# Altium PCB interposer-breakout.PcbDoc
Units mil, origin at the board's own origin, x right, y up, seen from the top; angles counter-clockwise.
Board outline 1400 x 1259 mil, 2 copper layers (Top, Bottom), stack 52.756 mil thick; 12 components, 30 nets, 90 pads, 64 vias.
Unrouted connection lines stored in the file: 4.
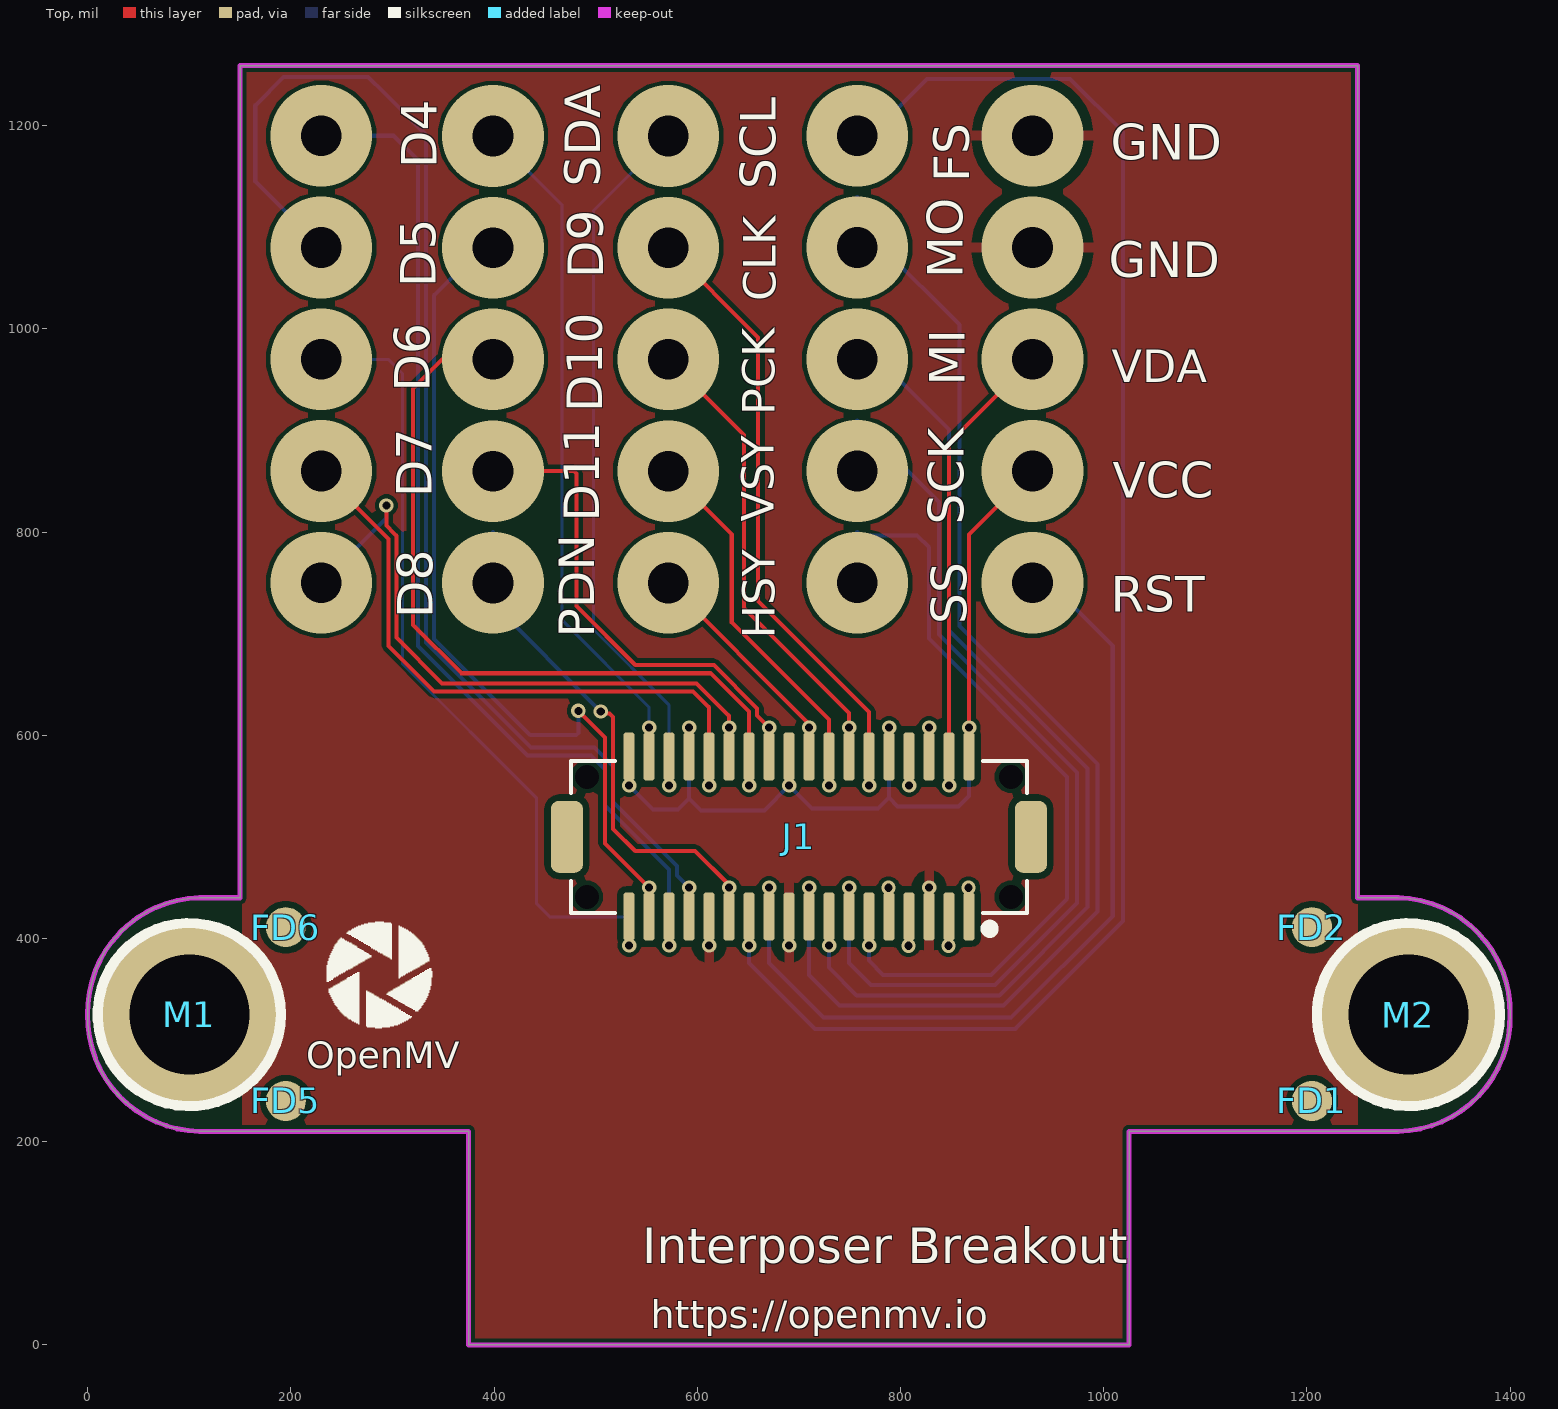
[diagram p0: Top view]
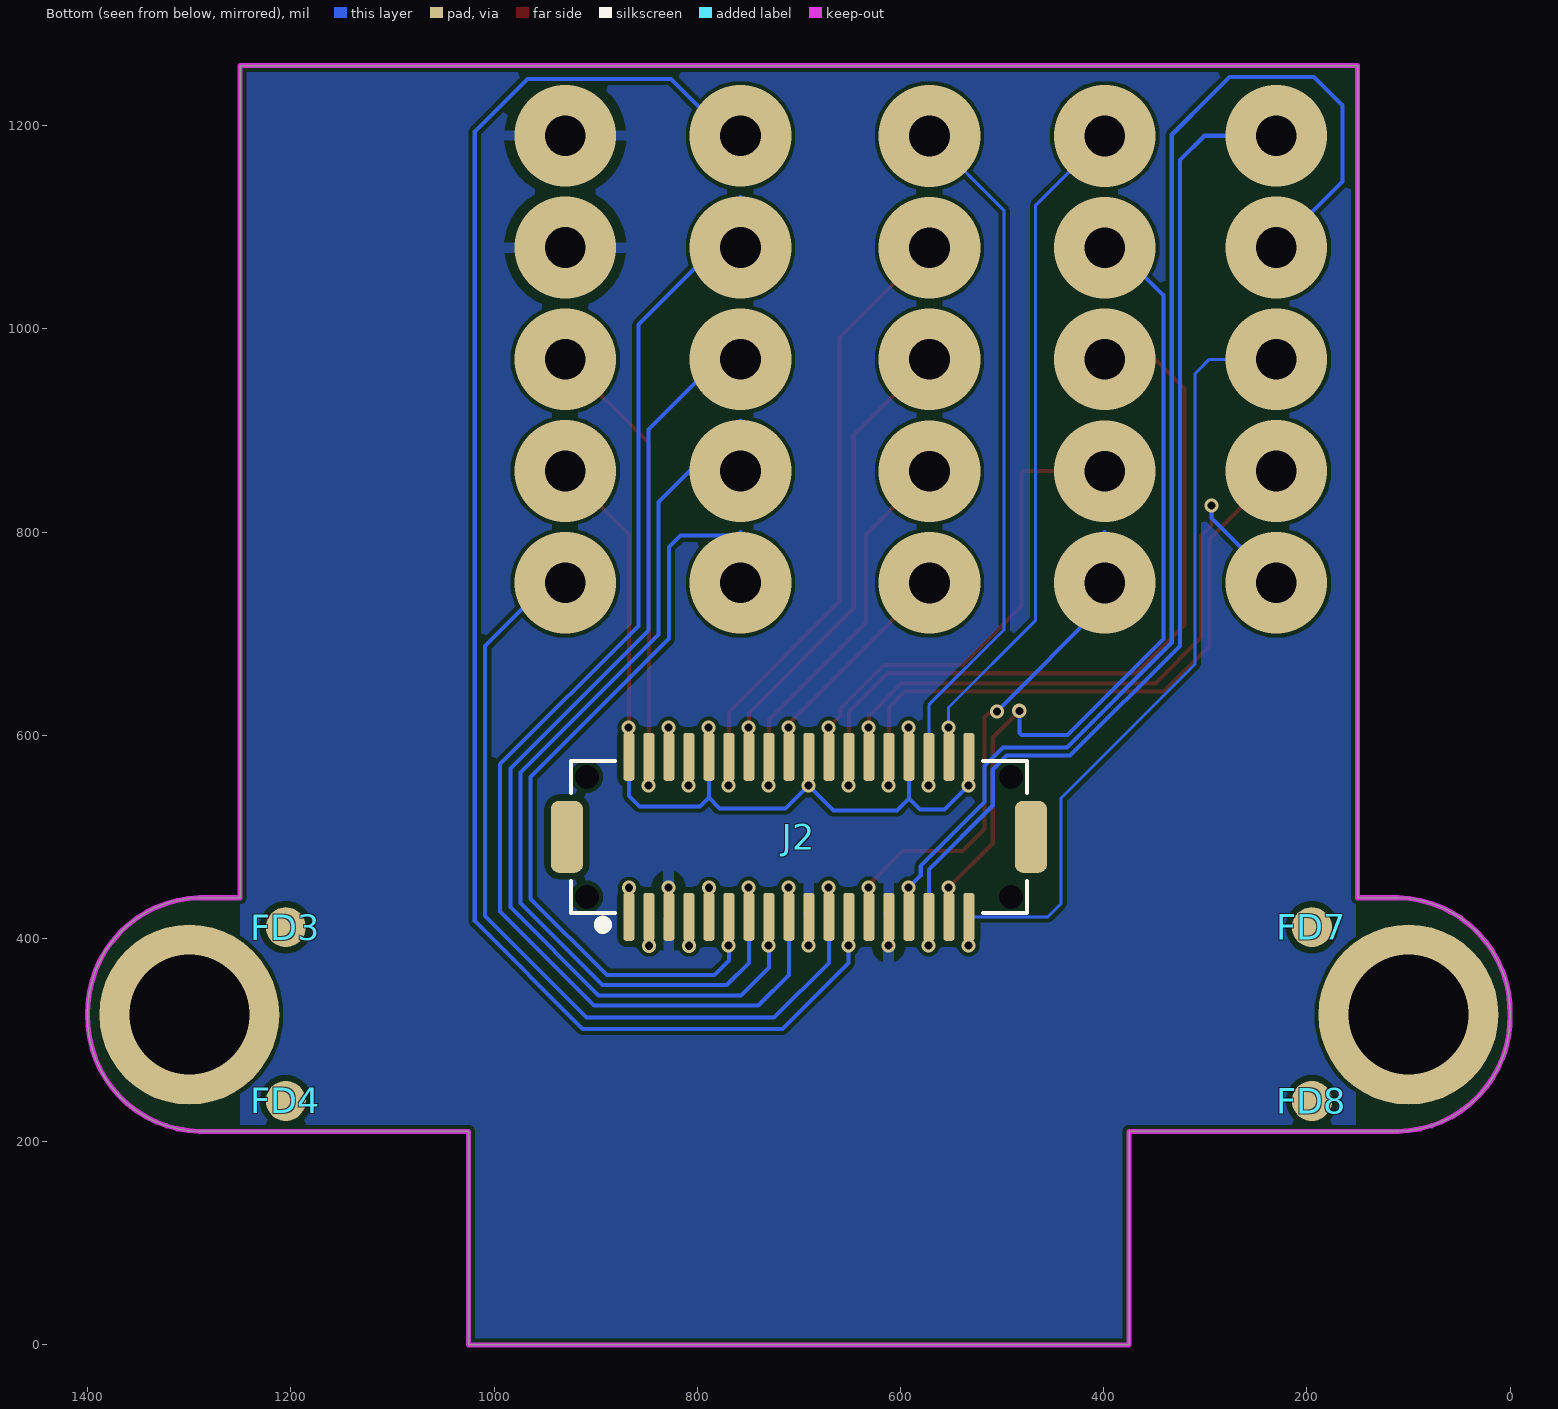
[diagram p1: Bottom view, seen from below]

## Layer stack, top to bottom
Top Solder: solder mask 0.4, Solder Resist, Dk 3.5
Top: signal copper 1.378
Dielectric 1: dielectric 50, FR-4, Dk 4.8
Bottom: signal copper 1.378
Bottom Solder: solder mask 0.4, Solder Resist, Dk 3.5

## Board outline
110.03,210 cw(c112.53,322.5) 0.03,325 cw(c112.53,327.5) 110.03,440 150,440 150,1259 1250,1259 1250,440 1290.03,440 cw(c1287.53,327.5) 1400.03,325 cw(c1287.53,322.5) 1290.03,210 1025.03,210 1025.03,0 375.03,0 375.03,210

## Design rules (kind name [scope] priority, off if disabled: settings)
BoardOutlineClearance mdCopperDimension [All] p1: gap=5 ignorepadtopadclearanceinfootprint=FALSE
Clearance [All] p1: gap=4 ignorepadtopadclearanceinfootprint=FALSE except(6: SMDPad-Fill SMDPad-Poly SMDPad-Region Fill-Fill Fill-Poly Fill-Region Poly-Poly Poly-Region Region-Region)
ComponentClearance [All] p1: gap=5 collisioncheckmode=3 verticalgap=10 showdistances=FALSE
HoleSize HoleSize_For_NetClass_signal [InNetClass('signal')] p1: absolutevalues=TRUE maxlimit=4 minlimit=4 maxpercent=80.000 minpercent=20.000
HoleSize HoleSize_For_NetClass_pwr [InNetClass('pwr')] p2: absolutevalues=TRUE maxlimit=4 minlimit=4 maxpercent=80.000 minpercent=20.000
HoleSize HoleSize_For_NetClass_gnd [InNetClass('gnd')] p3: absolutevalues=TRUE maxlimit=4 minlimit=4 maxpercent=80.000 minpercent=20.000
HoleSize [All] p4: absolutevalues=TRUE maxlimit=100000 minlimit=4 maxpercent=80.000 minpercent=20.000
HoleToHoleClearance mdDrill [All] p1: gap=3 allowstackedmicrovias=TRUE
MinimumSolderMaskSliver [All] p1 off: minsoldermaskwidth=10
PasteMaskExpansion Expansion_SMDPaste_OFF [InPadClass('SMDPaste_OFF')] p1: expansion=0
PasteMaskExpansion mlMinCreamFrame [All] p2: expansion=0
PolygonConnect PolygonConnect_1 [HasFootprint('C0201')] p1: thpad.connectstyle=Relief thpad.reliefconductorwidth=10 thpad.reliefentries=4 thpad.polygonreliefangle="90 Angle" thpad.airgapwidth=10 smdpad.connectstyle=Relief smdpad.reliefconductorwidth=6 smdpad.reliefentries=4 smdpad.polygonreliefangle="90 Angle" smdpad.airgapwidth=6 via.connectstyle=Direct via.reliefconductorwidth=10 via.reliefentries=4 via.polygonreliefangle="90 Angle" via.airgapwidth=10
PolygonConnect [All] p2: connectstyle=Relief reliefconductorwidth=10 reliefentries=4 polygonreliefangle="90 Angle" airgapwidth=10
RoutingVias [All] p1: holewidth=8 width=14 viastyle="Through Hole" minholewidth=8 minwidth=14 maxholewidth=100 maxwidth=100
SolderMaskExpansion mlMinStopFrame [All] p1: expansion=2 istentingtop=FALSE
Width [All] p1: maxlimit=100 minlimit=3 preferedwidth=3
25 further rules are at their usual default settings.

## Classes and differential pairs
pad class SMDPaste_OFF: FD1-1 FD2-1 FD3-1 FD4-1 FD5-1 FD6-1 FD7-1 FD8-1 J1-1 J1-2 J1-3 J1-4 J1-5 J1-6 J1-7 J1-8 J1-9 J1-10 J1-11 J1-12 J1-13 J1-14 J1-15 J1-16 J1-17 J1-18 J1-19 J1-20 J1-21 J1-22 J1-23 J1-24 J1-25 J1-26 J1-27 J1-28 J1-29 J1-30 J1-31 J1-32 J1-33 J1-34 J1-35 J1-36 J2-1 J2-2 J2-3 J2-4 J2-5 J2-6 J2-7 J2-8 J2-9 J2-10 J2-11 J2-12 J2-13 J2-14 J2-15 J2-16 J2-17 J2-18 J2-19 J2-20 J2-21 J2-22 J2-23 J2-24 J2-25 J2-26 J2-27 J2-28 J2-29 J2-30 J2-31 J2-32 J2-33 J2-34 J2-35 J2-36

## Components (designator, comment, footprint, x,y, rotation, side; value= is the part's Value field where it differs from the comment)
FD1 "FIDUCIAL1X2" FIDUCIAL-1X2 1205.03,240 r0 top
FD2 "FIDUCIAL1X2" FIDUCIAL-1X2 1205.03,411 r0 top
FD3 "FIDUCIAL1X2" FIDUCIAL-1X2 1205.03,411 r180 bottom
FD4 "FIDUCIAL1X2" FIDUCIAL-1X2 1205.03,240 r180 bottom
FD5 "FIDUCIAL1X2" FIDUCIAL-1X2 195.03,240 r0 top
FD6 "FIDUCIAL1X2" FIDUCIAL-1X2 195.03,411 r0 top
FD7 "FIDUCIAL1X2" FIDUCIAL-1X2 195.03,411 r180 bottom
FD8 "FIDUCIAL1X2" FIDUCIAL-1X2 195.03,240 r180 bottom
J1 "DF12NB(3.0)-36DS-0.5V(51)" DF12-36-DS 700.03,500 r0 top locked
J2 "DF12-36-DP" DF12-36-DP 700.03,500 r0 bottom locked
M1 "9774030151R" 9774030243R 100.03,325 r0 top
M2 "9774030151R" 9774030243R 1300.03,325 r0 top

## Footprints (in the part's own frame and the unit in brackets; to place one, negate y for a bottom-side part, rotate by r counter-clockwise, add the part's x,y. Pads: shape width x height; smd on the part's side, far side on the other; paste and mask are expansions set on the pad)
9774030243R [mm] "Round Standoff Threaded M2x0.4 Steel 0.118\" (3.00mm)"
  round 4.5 hole 3 unplated mask+0.05: 1(0,0)
  body extent -2.17,-2.17 2.18,2.17, height 3.01
DF12-36-DP [mm] "36 Position Connector Receptacle, Center Strip Contacts Surface Mount Gold"
  rrect50% 0.8x1.8 smd mask+0.05: 0(-5.8,0) 0(5.8,0)
  rrect50% 0.28x1.2 smd mask+0.05: 1(4.25,2) 2(4.25,-2) 3(3.75,2) 4(3.75,-2) 5(3.25,2) 6(3.25,-2) 7(2.75,2) 8(2.75,-2) 9(2.25,2) 10(2.25,-2) 11(1.75,2) 12(1.75,-2) 13(1.25,2) 14(1.25,-2) 15(0.75,2) 16(0.75,-2) 17(0.25,2) 18(0.25,-2) 19(-0.25,2) 20(-0.25,-2) 21(-0.75,2) 22(-0.75,-2) 23(-1.25,2) 24(-1.25,-2) 25(-1.75,2) 26(-1.75,-2) 27(-2.25,2) 28(-2.25,-2) 29(-2.75,2) 30(-2.75,-2) 31(-3.25,2) 32(-3.25,-2) 33(-3.75,2) 34(-3.75,-2) 35(-4.25,2) 36(-4.25,-2)
  round 0 hole 0.6 unplated: MH1(-5.3,-1.5) MH2(5.3,-1.5)
  silkscreen extent -5.7,-1.9 5.7,2.3, body extent -6.05,-2.3 6.05,2.3, height 2.3
DF12-36-DS [mm] "36 Position Connector Receptacle, Center Strip Contacts Surface Mount Gold"
  rrect50% 0.8x1.8 smd mask+0.05: 0(-5.8,0) 0(5.8,0)
  rrect50% 0.28x1.2 smd mask+0.05: 1(4.252,-1.993) 2(4.252,2.007) 3(3.752,-1.993) 4(3.752,2.007) 5(3.252,-1.993) 6(3.252,2.007) 7(2.752,-1.993) 8(2.752,2.007) 9(2.252,-1.993) 10(2.252,2.007) 11(1.752,-1.993) 12(1.752,2.007) 13(1.252,-1.993) 14(1.252,2.007) 15(0.752,-1.993) 16(0.752,2.007) 17(0.252,-1.993) 18(0.252,2.007) 19(-0.248,-1.993) 20(-0.248,2.007) 21(-0.748,-1.993) 22(-0.748,2.007) 23(-1.248,-1.993) 24(-1.248,2.007) 25(-1.748,-1.993) 26(-1.748,2.007) 27(-2.248,-1.993) 28(-2.248,2.007) 29(-2.748,-1.993) 30(-2.748,2.007) 31(-3.248,-1.993) 32(-3.248,2.007) 33(-3.748,-1.993) 34(-3.748,2.007) 35(-4.248,-1.993) 36(-4.248,2.007)
  round 0 hole 0.6 unplated: MH1(-5.3,-1.5) MH2(5.3,-1.5)
  silkscreen extent -5.7,-2.4 5.7,1.9, body extent -6.05,-2.3 6.05,2.3, height 2.7
FIDUCIAL-1X2 [mm] "FIDUCIAL-1X2"
  rrect100% 1x1 smd paste+0: 1(0,0)

## Part data
FD1 FD2 FD3 FD4 FD5 FD6 FD7 FD8: "Fiducial Alignment Points    Point-of-reference for pick-and-place machines and other optical instruments.", DeviceName=1X2, DeviceSetName=FIDUCIAL, GateName_1=G$1, LibraryName=SparkFun-Aesthetics, SymbolName_1=FIDUCIAL
J1: library part DF12-36-DS, DeviceSetName=DF12-36-DS, GateName_1=G$1, LibraryName=DF12-36-DS, MPN=DF12NB(3.0)-36DS-0.5V(51), SymbolName_1=DF12-36
J2: MPN=DF12NB(3.0)-36DP-0.5V(51), DeviceSetName=DF12-36-DP, GateName_1=G$1, LibraryName=DF12NB(3.0)-36DP-0.5V(51), SymbolName_1=DF12-36
M1 M2: DeviceSetName=9774030151R, GateName_1=G$1, LibraryName=9774030151R, MPN=9774030151R, SymbolName_1=9774030151R

## Via types
v1: diameter 14, hole 8, Top to Bottom, tented both sides, 39 vias
v2: diameter 100, hole 40, Top to Bottom, 25 vias

## Nets (pads, with @x,y where several pads share a name; then routed paths per layer and width w, separated by ;. In a path a pad name is that pad's centre, name@x,y a point inside that pad or via, vN(x,y) a via of type N, cw(c..) or ccw(c..) an arc to the next point about the centre after c; other vN are vias at no path point)
1: J1.1 J2.1
  other v1: 867.12,449.8
3: J1.3 J2.3
  other v1: 847.44,392.72
6: J1.6 J2.6
  other v1: 828.28,607.56
7: J1.7 J2.7
  other v1: 808.07,392.72
8: J1.8 J2.8
  other v1: 808.59,550.48
9: J1.9 J2.9
  other v1: 788.38,449.8
DCMI_MISO: J1.15 J2.15 | length 997.3
  Bottom w4: J2.15 729.56,371.44 757,344 897.28,344 984,430.72 984,567.28 848,703.28 848,901 779,970 v2(757.49,970)
  other v1: 729.85,393
DCMI_MOSI: J1.17 J2.17 | length 1193.1
  Bottom w4: J2.17 709.87,364.13 740,334 901.43,334 994,426.57 994,571.43 858,707.43 858,1004 782,1080 v2(757.49,1080) ; v2@757.49,1129.86 v2@782.42,1104.93
  other v1: 710.17,450.08
DCMI_PWDN: J1.25 J2.25 | length 513.1
  Top w4: v1(504.99,623.44) 506.89,621.53 513.47,621.53 517.18,617.82 517.18,507.82 539,486 598,486 631.2,452.8 J1.25
  Bottom w4: 399,800 399,729.42 v1(504.99,623.44)
  other v1: 631.43,450.08
  other v2: 399,749.86
DCMI_SCLK: J1.13 J2.13 | length 877.4
  Bottom w4: J2.13 749.24,375.76 771,354 893.14,354 974,434.86 974,563.14 838,699.14 838,829.35 v2@757.49,909.86
  other v1: 749.54,450.08
  other v2: 757.49,860
DCMI_SSEL: J1.11 J2.11 | length 754.2
  Bottom w4: v2@757.49,799.86 760.7,796.65 816.35,796.65 828,785 828,695 964,559 964,439 889,364 783,364 768.93,378.07 J2.11
  other v1: 769.22,393
  other v2: 757.49,750
GND: J1.5 J1.19 J1.27 J2.5 J2.19 J2.27
  other v1: 611.74,393 690.48,393 828.28,450.08
  other v2: 930,1080 930,1190
SENSOR_CLK: J1.12 J2.12 | length 582.6
  Top w4: v2(571.49,1079.86) 660,991.35 660,732 768.99,623.01 J1.12
  other v1: 769.22,550.48
SENSOR_D4: J1.31 J2.31 | length 988.7
  Bottom w4: v2(230,1190) 301,1190 325,1166 325,688 433,580 495.61,580 509.18,566.44 509.18,530.82 572.08,467.93 J2.31
  other v1: 572.37,393
SENSOR_D5: J1.29 J2.29 | length 1255
  Bottom w4: v2(230,1080) 165,1145 165,1220 193,1248 276,1248 292,1232 333,1191 333,691.31 436.31,588 498.93,588 517.18,569.75 517.18,534.14 580.08,471.24 580.08,462.06 v1(592.06,450.08)
SENSOR_D6: J1.35 J2.35 | length 758.5
  Bottom w3: v2(230,970) 296,970 310,956 310,670 442,538 442,434 454.74,421.26 J2.35
  other v1: 533,393
SENSOR_D7: J1.28 J2.28 | length 588.4
  Top w4: v2(230,860) 230,859 296,793 296,688 341,643 596,643 611.51,627.49 J1.28
  other v1: 611.74,550.48
SENSOR_D8: J1.26 J2.26 | length 635.8
  Top w4: v1(294,826) 294,806.31 301.66,798.66 304,796.31 304,696 349,651 599.31,651 631.2,619.12 J1.26
  Bottom w4: v2(230,750) 294,814 v1(294,826)
  other v1: 631.43,607.56
SENSOR_D9: J1.33 J2.33 | length 822.4
  Top w4: v1(483,624) 509.18,597.82 509.18,493.58 v1(552.69,450.08)
  Bottom w4: v2(399,1079.86) 387.86,1079.86 341,1033 341,694.63 435.63,600 480.66,600 483,602.34 v1(483,624)
SENSOR_D10: J1.24 J2.24 | length 733.1
  Top w4: v2(399,969.86) 348.86,969.86 320.44,941.44 320.44,708.56 368,661 613,661 650.88,623.12 J1.24
  other v1: 651.11,550.48
SENSOR_D11: J1.22 J2.22 | length 491.6
  Top w4: v2@364.24,859.86 478.66,859.86 481,857.52 481,727 539,669 616.31,669 658.88,626.43 658.88,619.47 v1(670.8,607.56)
  other v2: 399,859.86
SENSOR_FSIN: J1.23 J2.23 | length 1563.7
  Bottom w4: v1(651.11,393) 651.11,375.89 716,311 913,311 1019,417 1019,1194 967,1246 826,1246 v2@743.69,1163.69
  other v2: 757.49,1189.86
SENSOR_HSYNC: J1.18 J2.18 | length 228.2
  Top w4: v2(571.49,749.86) 708.25,613.1 708.25,609.24 709.94,607.56 J1.18
  other v1: 710.17,607.56
SENSOR_PCLK: J1.14 J2.14 | length 464.5
  Top w4: v2(571.49,969.86) 646,895.35 646,725 749.31,621.69 749.31,607.56 J1.14
  other v1: 749.54,607.56
SENSOR_RST: J1.21 J2.21 | length 818.4
  Bottom w4: J2.21 670.5,375.76 724.26,322 909,322 1009,422 1009,688 947,750 v2(930,750)
  other v1: 670.8,450.08
SENSOR_SCL: J1.32 J2.32 | length 672.1
  Bottom w3: v2(571.49,1189.72) 498,1116.23 498,704 572.08,629.92 J2.32
  other v1: 572.37,550.48
SENSOR_SDA: J1.34 J2.34 | length 645.8
  Bottom w3: v2(399,1189.72) 467,1121.72 467,713 552.69,627.31 v1(552.69,607.56)
SENSOR_VSYNC: J1.16 J2.16 | length 346.3
  Top w4: v2(571.49,859.86) 634,797.35 634,711 729.62,615.38 J1.16
  other v1: 729.85,550.48
VCC: J1.2 J1.10 J1.20 J1.30 J1.36 J2.2 J2.10 J2.20 J2.30 J2.36 | length 811.5
  Top w4: J1.2 867.42,797.42 v2(930,860)
  Bottom w4: v1(533,550.48) 556.48,527 581,527 591.76,537.76 ; J2.30 591.76,537.76 ; J2.10 788.61,538.61 ; J2.2 867.35,540.35 857,530 797.22,530 788.61,538.61 ; 591.76,537.76 603.52,526 666,526 v1(690.48,550.48) 712.96,528 778,528 788.61,538.61
  other v1: 592.06,607.56 788.91,607.56 867.65,607.56
VDDA: J1.4 J2.4 | length 425.1
  Top w4: J1.4 847.73,887.73 v2(930,970)
  other v1: 847.96,550.48
pads on no net: FD1.1 FD2.1 FD3.1 FD4.1 FD5.1 FD6.1 FD7.1 FD8.1 J1.0 J1.MH1 J1.MH2 J2.0 J2.MH1 J2.MH2 M1.1 M2.1

## Polygon pours and split planes (outlines as drawn)
GND on Bottom "GND_L02_P001" (solid, remove dead copper, pour order 1): 152,1258 152,0 1250,0 1250,1258
GND on Top "GND_L01_P000" (solid, remove dead copper, pour order 0): 152,1258 152,0 1250,0 1250,1258

## Keep-outs
Keep-Out Layer:
  the board outline again, w5

## Silkscreen, mask and mechanical layers (free items; w line width, h text height)
Top Overlay:
  drawing of 264 lines, arcs and shapes, not listed
  text "GND" at 1007,1166.51 h35
  text "D4" at 343.49,1158 h35 r90
  text "FS" at 867.49,1144 h35 r90
  text "SDA" at 504.49,1140 h35 r90
  text "SCL" at 677.05,1137.35 h35 r90
  text "GND" at 1005,1050.51 h35
  text "D9" at 507.49,1050 h35 r90
  text "MO" at 861.49,1050 h35 r90
  text "D5" at 342.49,1041 h35 r90
  text "CLK" at 677.49,1027 h32 r90
  text "VDA" at 1008,947.51 h32
  text "MI" at 863.49,944 h35 r90
  text "D6" at 336.49,938 h35 r90
  text "D10" at 506.49,918 h35 r90
  text "PCK" at 676.49,915 h32 r90
  text "D7" at 338.49,834 h35 r90
  text "VCC" at 1009,833.51 h35
  text "D11" at 503.49,810 h35 r90
  text "VSY" at 675.49,810 h32 r90
  text "SCK" at 862.49,807 h35 r90
  text "RST" at 1007,721.51 h35
  text "D8" at 339.49,715 h35 r90
  text "SS" at 865.49,709 h35 r90
  text "PDN" at 498.49,696 h35 r90
  text "HSY" at 676.49,695 h32 r90
  text "OpenMV" at 215,272 h26.35
  text "Interposer Breakout" at 546,80.48 h35
  text "https://openmv.io" at 554.43,16.12 h27.2
Dimension:
  text "OpenMV Interposer Breakout" at 1349.29,629.85 h80